# Altium PCB fan_toolips_f2_dip.PcbDoc
Units mil, origin at the board's own origin, x right, y up, seen from the top; angles counter-clockwise.
Board outline 1828.94 x 9262.02 mil, 2 copper layers (Top Layer, Bottom Layer); 58 components, 71 nets, 198 pads, 0 vias.
Unrouted connection lines stored in the file: 13.
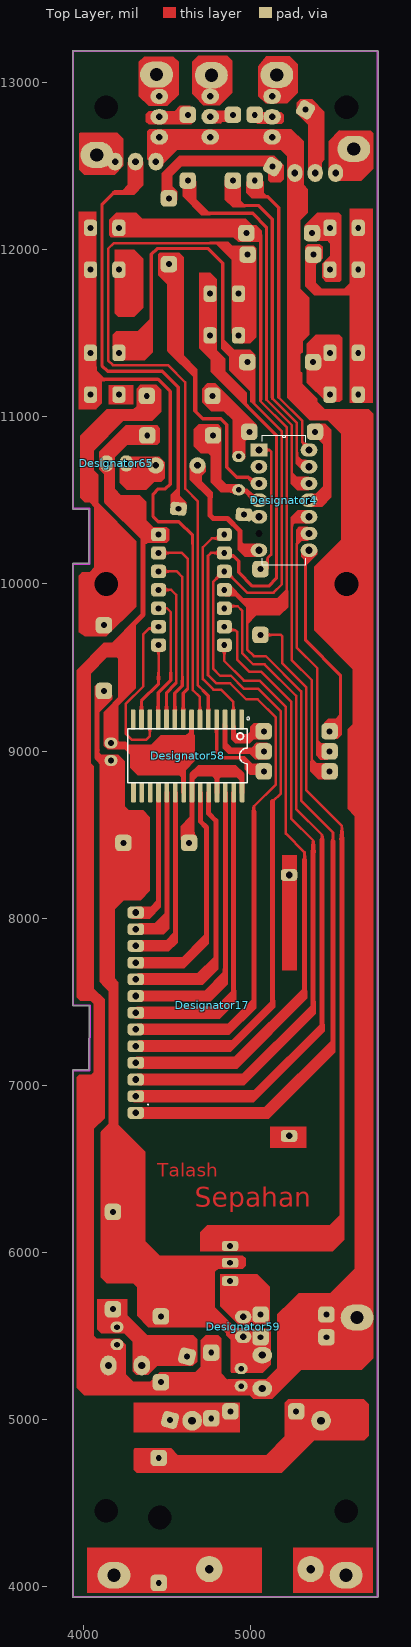
[diagram p0: Top Layer view]
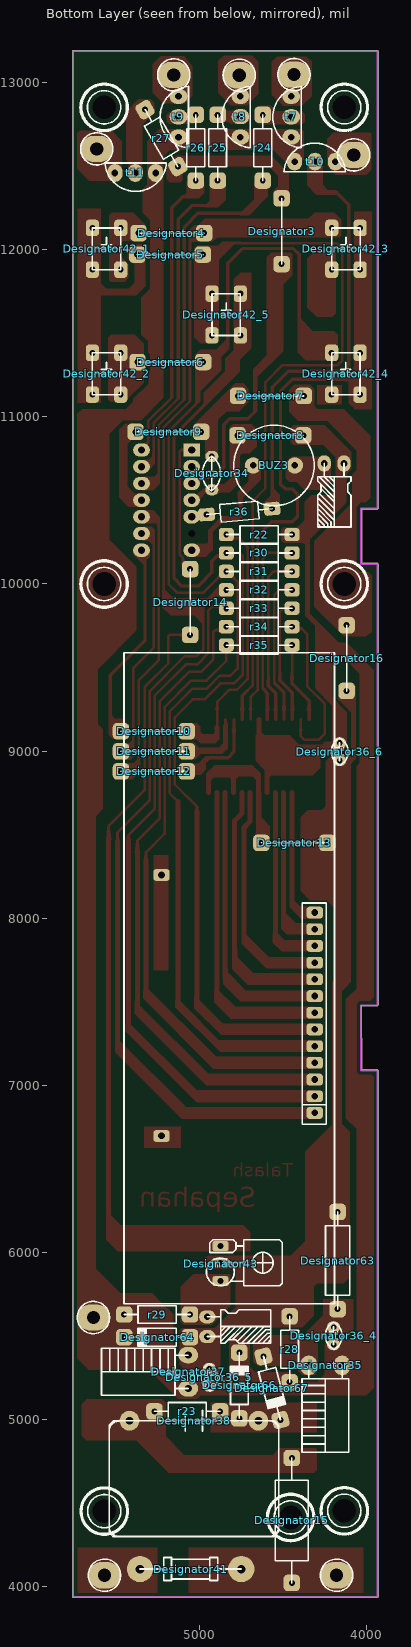
[diagram p1: Bottom Layer view, seen from below]

## Layer stack, top to bottom
Top Solder: solder mask 0.4, Solder Resist, Dk 3.5
Top Layer: signal copper 1.4
Dielectric 1: dielectric 12.6, FR-4, Dk 4.8
Bottom Layer: signal copper 1.4
Bottom Solder: solder mask 0.4, Solder Resist, Dk 3.5

## Board outline
3931.99,3937 3931.99,7086.61 cw(c3937,7086.61) 3937,7091.63 4030.5,7091.55 4030.98,7475.3 3937,7475.3 cw(c3937,7480.31) 3931.99,7480.31 3931.99,10118.11 cw(c3937,10118.11) 3937,10123.13 4030.46,10123.13 4030.46,10447.74 3937,10447.74 cw(c3937,10452.76) 3931.99,10452.76 3931.99,13188.98 cw(c3937,13188.98) 3937,13193.99 5755.42,13193.99 cw(c5755.91,13189) 5760.92,13189 5760.92,3937 cw(c5755.91,3937) 5755.91,3931.99 3937,3931.99 cw(c3937,3937)

## Design rules (kind name [scope] priority, off if disabled: settings)
Clearance [All] p1: gap=15 ignorepadtopadclearanceinfootprint=FALSE
ComponentClearance [All] p1: gap=0 collisioncheckmode=3 verticalgap=0 showdistances=FALSE
PolygonConnect [All] p1: connectstyle=Relief reliefconductorwidth=10 reliefentries=4 polygonreliefangle="90 Angle" airgapwidth=10
RoutingVias [All] p1: holewidth=28 width=50 viastyle="Through Hole" minholewidth=28 minwidth=50 maxholewidth=28 maxwidth=50
SolderMaskExpansion [All] p1: expansion=4 istentingtop=FALSE
Width [All] p1: maxlimit=100 minlimit=10 preferedwidth=10 minimp=50.000000 maximp=50.000000 favimp=50.000000
29 further rules are at their usual default settings.

## Components (designator, comment, footprint, x,y, rotation, side; value= is the part's Value field where it differs from the comment)
BUZ3 "Comment" BUZZER 4680,10710 r180 bottom
Designator3 "Comment" jamp 4509,11915 r90 bottom
Designator4 "Comment" dip14 5048,10802 r0 top
Designator4 "Comment" jamp 4972.3,12101 r0 bottom
Designator5 "Comment" jamp 4980.3,11972 r0 bottom
Designator6 "Comment" jamp 4978.3,11329 r0 bottom
Designator7 "Comment" jamp 4376.3,11126 r0 bottom
Designator8 "Comment" jamp 4379.3,10890 r0 bottom
Designator9 "Comment" jamp 4990.3,10911 r0 bottom
Designator10 "Comment" jamp 5077.3,9118 r0 bottom
Designator11 "Comment" jamp 5077.3,8998 r0 bottom
Designator12 "Comment" jamp 5077.3,8878 r0 bottom
Designator13 "Comment" jamp 4236.3,8450 r0 bottom
Designator14 "Comment" jamp 5057,10089 r270 bottom
Designator15 "Comment" "self _ra" 4448,4019 r90 bottom
Designator16 "Comment" jamp 4119.67,9359.78 r90 bottom
Designator17 "Comment" display_f2 4311,6833 r0 top locked
Designator34 "Comment" CAP-ADASI-200MIL 4926.95,10763.85 r270 bottom
Designator35 "Comment" CAP-EL-200MIL-RA 4147,5321 r0 bottom
Designator36_4 "Comment" CAP-ADASI-105MIL 4198,5551 r270 bottom
Designator36_5 "Comment" CAP-ADASI-105MIL 4941.8,5302.42 r270 bottom
Designator36_6 "Comment" CAP-ADASI-105MIL 4162.12,9047.99 r270 bottom
Designator37 "Comment" CAP-EL-200MIL-RA 5067.78,5183.14 r90 bottom
Designator38 "Comment" CAP-POLY 4648.35,4990 r0 bottom
Designator41 "Comment" FUZE 4750.7,4102 r0 bottom
Designator42_1 "Comment" SW-PUSH 5642.44,11882 r180 bottom locked
Designator42_2 "Comment" SW-PUSH 5642.44,11134 r180 bottom locked
Designator42_3 "Comment" SW-PUSH 4209,11881.89 r180 bottom locked
Designator42_4 "Comment" SW-PUSH 4209.37,11134 r180 bottom locked
Designator42_5 "Comment" SW-PUSH 4926,11488.19 r180 bottom locked
Designator43 "Comment" IR-RECIVER 4875,6036 r270 bottom
Designator58 "Comment" sop-28 4620.82,8970.5 r270 top
Designator59 "Comment" CAP-EL-105MIL-RA 4954,5494 r90 top
Designator63 "Comment" RES-0.5W 4174,6240.68 r270 bottom
Designator64 "Comment" DIOD 5451.7,5490 r180 bottom
Designator65 "Comment" CAP-EL-105MIL-RA 4253.72,10721.63 r180 top
Designator66 "Comment" DIOD 4762.34,5398.14 r270 bottom
Designator67 "Comment" DIOD 4516,4995 r75 bottom
r22 "Comment" RES-0.25W#1 4840.5,10296 r180 bottom
r23 "Comment" RES-0.25W#2 5271,5046 r180 bottom
r24 "Comment" RES-0.25W#2 4622.05,12809.28 r270 bottom
r25 "Comment" RES-0.25W#2 4892,12809.28 r270 bottom
r26 "Comment" RES-0.25W#2 5023.05,12809.28 r270 bottom
r27 "Comment" RES-0.25W#2 5130.15,12499.05 r60 bottom
r28 "Comment" RES-0.25W#2 4461,5221 r90 bottom
r29 "Comment" RES-0.25W#2 5451.7,5626 r180 bottom
r30 "Comment" RES-0.25W#1 4840.5,10185.63 r180 bottom
r31 "Comment" RES-0.25W#1 4840.5,10075.26 r180 bottom
r32 "Comment" RES-0.25W#1 4840.5,9964.89 r180 bottom
r33 "Comment" RES-0.25W#1 4840.5,9854.52 r180 bottom
r34 "Comment" RES-0.25W#1 4840.5,9744.15 r180 bottom
r35 "Comment" RES-0.25W#1 4840.5,9633.78 r180 bottom
r36 "Comment" RES-0.25W#3 4958,10416 r175 bottom
t7 "Comment" bt131 4451.66,12675.35 r90 bottom
t8 "Comment" bt131 4755.91,12675.95 r90 bottom
t9 "Comment" bt131 5126.66,12675.35 r90 bottom
t10 "Comment" bt131 4431.05,12529 r180 bottom
t11 "Comment" bt131 5262.95,12461 r0 bottom

## Footprints (in the part's own frame and the unit in brackets; to place one, negate y for a bottom-side part, rotate by r counter-clockwise, add the part's x,y. Pads: shape width x height; smd on the part's side, far side on the other; paste and mask are expansions set on the pad)
bt131 [mm]
  oval 2.3x2.7 hole 1: A1(0,0) A2(6.2,0) G(3.1,0)
  silkscreen extent -1.62,-1.52 7.72,2.8
BUZZER [mm]
  round 2.5 hole 1: 1(0,0) 2(6.35,0)
  silkscreen extent -2.95,-6.12 9.3,6.12
CAP-ADASI-105MIL [mm]
  oval 1.7x2 hole 0.85: 1(0,0) 2(2.667,0)
  silkscreen extent -0.76,-1.25 3.41,1.3
CAP-ADASI-200MIL [mm]
  oval 1.7x2 hole 0.85: 1(0,0) 2(5.08,0)
  silkscreen extent -0.05,-1.45 5.25,1.35
CAP-EL-105MIL-RA [mm]
  oval 2x2.5 hole 1: +(3,0) -(0,0)
CAP-EL-200MIL-RA [mm]
  oval 2.5x3 hole 1.1: +(0,0) -(5.08,0)
  silkscreen extent -1.02,0 6.1,13.21
CAP-POLY [mm]
  round 3 hole 1.2: 1(0,0) 2(19.6,0)
  silkscreen extent -3.1,-1.6 22.7,17.6
DIOD [mm]
  rrect50% 2.5x2.5 hole 0.9: a(10,0) c(0,0)
  silkscreen extent 0,-1.35 10,1.35
dip14 [mil]
  rect 100x80 hole 44: 1(0,0)
  oval 100x80 hole 44: 2(0,-100) 3(0,-200) 4(0,-300) 5(0,-400) 7(0,-600) 8(300,-600) 9(300,-500) 10(300,-400) 11(300,-300) 12(300,-200) 13(300,-100) 14(300,0)
  round 0 hole 44: 6(0,-500)
  silkscreen extent 20,-688 280,88
display_f2 [mm]
  rrect50% 2.5x1.778 hole 1: 1(0,0) 2(0,2.54) 3(0,5.08) 4(0,7.62) 5(0,10.16) 6(0,12.7) 7(0,15.24) 8(0,17.78) 9(0,20.32) 10(0,22.86) 11(0,25.4) 12(0,27.94) 13(0,30.48) 14(23.3,-3.5) 15(23.3,36.18)
  silkscreen extent 1.85,1.27 1.88,1.3
FUZE [mm]
  round 4 hole 1.3: 1(0,0) 2(15.4,0)
  silkscreen extent 0,-1.75 15.4,1.75
IR-RECIVER [mm]
  rrect50% 1.5x2.5 hole 0.9: 1(0,0) 2(2.54,0) 3(5.334,0)
  silkscreen extent -0.97,-2.13 6.05,9.4
jamp [mm]
  rrect50% 2.5x2.5 hole 0.9: 1(0,0) 2(10,0)
  silkscreen extent 0,0 10,0
RES-0.5W [mm]
  rrect50% 2.5x2.5 hole 0.9: 1(0,0) 2(14.8,0)
  silkscreen extent 0,-1.85 14.8,1.85
RES-0.25W#1 [mil]
  rrect50% 90x80 hole 35.43: 1(0,0) 2(393.7,0)
  silkscreen extent 0,-53 394,53
RES-0.25W#2 [mil]
  rrect50% 98.43x98.43 hole 35.43: 1(0,0) 2(393.7,0)
  silkscreen extent 0,-53 394,53
RES-0.25W#3 [mil]
  rrect50% 98.43x80 hole 35.43: 1(0,0) 2(393.7,0)
  silkscreen extent 0,-53 394,53
"self _ra" [mm]
  rrect50% 2.5x2.5 hole 0.9: 1(0,0) 2(19,0)
  silkscreen extent 0,-2.5 19,2.5
sop-28 [mil]
  rrect50% 120x28 smd: 1(-218.5,323.82) 2(-218.5,273.82) 3(-218.5,223.82) 4(-218.5,173.82) 5(-218.5,123.82) 6(-218.5,73.82) 7(-218.5,23.82) 8(-218.5,-26.18) 9(-218.5,-76.18) 10(-218.5,-126.18) 11(-218.5,-176.18) 12(-218.5,-226.18) 13(-218.5,-276.18) 14(-218.5,-326.18) 15(218.5,-323.82) 16(218.5,-273.82) 17(218.5,-223.82) 18(218.5,-173.82) 19(218.5,-123.82) 20(218.5,-73.82) 21(218.5,-23.82) 22(218.5,26.18) 23(218.5,76.18) 24(218.5,126.18) 25(218.5,176.18) 26(218.5,226.18) 27(218.5,276.18) 28(218.5,326.18)
  silkscreen extent -233,-358 161,371
SW-PUSH [mm]
  rrect50% 2x2.5 hole 0.9: 1(0,0) 1(0,6.35) 2(4.318,0) 2(4.318,6.35)
  silkscreen extent 0,0 4.32,6.35

## Free pads (board coordinates)
  round 60 hole 141.73: 8(4133.86,4451) 8(4134,10000) 8(4134,12854.33) 8(4455,4411) 8(5571,4448.82) 8(5572,10000) 8(5572,12854)
  oval 196.85x157.48 hole 78.74: 9(4077,12569) 9(4180,4065) 9(4435,13050) 9(4763,13046) 9(5155,13048) 9(5570,4065) 9(5616,12605) 9(5636,5608)

## Nets (pads, with @x,y where several pads share a name; then routed paths per layer and width w, separated by ;. In a path a pad name is that pad's centre, name@x,y a point inside that pad or via, vN(x,y) a via of type N, cw(c..) or ccw(c..) an arc to the next point about the centre after c; other vN are vias at no path point)
a: 
a1: Designator41.2 pad.9@5570,4065 | length 228.3
  Top Layer w60: Designator41.2 5375.5,4083.5 5551.5,4083.5 pad.9@5570,4065
a2: Designator15.1 Designator41.1 pad.9@4180,4065 | length 651.8
  Top Layer w60: pad.9@4180,4065 4198.5,4083.5 4445,4083.5 ; Designator15.1 4445,4022 4445,4083.5 ; Designator41.1 4732.2,4083.5 4445,4083.5
a3: Designator15.2 Designator38.2 r23.1 | length 1159
  Top Layer w60: Designator15.2 4483.03,4732 5127,4732 5256,4861 5256,4973 5270.94,4987.94 5417.94,4987.94 Designator38.2
a4: Designator38.1 Designator66.a Designator67.c r23.2 | length 382.4
  Top Layer w60: Designator67.c 4826.3,4995 r23.2
a5: 
a6: 
a7: 
a8: 
a9: 
b: Designator43.3 Designator59.+ r29.2 | length 318.6
  Top Layer w30: Designator43.3 4875,5736 4963.79,5647.21 5036.79,5647.21 r29.2
b1: BUZ3.1 Designator4.7 | length 780.6
  Top Layer w30: BUZ3.1 4680,10603 4756,10527 4756,10409.57 4773.57,10392 4860.21,10392 4936,10316.21 4936,10209.57 4953.57,10192 4995.43,10192 4995.86,10192.43 5038.43,10192.43 Designator4.7
b2: BUZ3.2 Designator65.- | length 181.1
  Top Layer w30: Designator65.- 4259.54,10715.81 4424.19,10715.81 BUZ3.2
b3: 
b4: 
b5: 
b6: 
b7: 
c: Designator4.8 Designator10.1 Designator10.2 Designator58.2 r22.1 | length 2816.1
  Top Layer w15: r22.1 4817,10272.5 4765.5,10272.5 4713,10220 4713,9430 4775,9368 4821,9368 4894.64,9294.36 4894.64,9079.36 4906,9068 4989,9068 5010.72,9089.72 5049.02,9089.72 Designator10.1
  Top Layer w20: Designator4.8 5327,10181 5327,9662 5536,9453 5536,9183 Designator10.2
c1: Designator4.9 Designator11.1 Designator11.2 Designator58.3 | length 1859
  Top Layer w15: Designator4.9 5338,10302 5275.5,10239.5 5275.5,9617.5 5397,9496 5397,9013 5408.07,9001.93 5467.07,9001.93 Designator11.2
  Top Layer w20: Designator58.3 4844.64,9032.36 4879,8998 Designator11.1
c2: Designator4.10 Designator12.1 Designator12.2 Designator58.4 | length 2285.5
  Top Layer w15: Designator4.10 5274,10402 5245.5,10373.5 5245.5,10163.69 cw(c5230.5,10163.63) 5245.5,10163.63 5245.5,9542.5 5364,9424 5364,8926 5408.07,8881.93 5467.07,8881.93 Designator12.2
  Top Layer w20: Designator58.4 4794.64,8994.36 4829.75,8959.25 4958.75,8959.25 4979,8939 4979,8901 5002,8878 Designator12.1
c3: 
c4: 
c5: 
d1: Designator17.13 Designator58.18 | length 821.6
  Top Layer w30: Designator17.13 4390,8033 4447,8090 Designator58.18
d2: Designator17.12 Designator58.19 | length 979.2
  Top Layer w30: Designator17.12 4453,7933 4497,7977 Designator58.19
d3: Designator17.11 Designator58.20 | length 1123.4
  Top Layer w30: Designator17.11 4493,7833 4547,7887 Designator58.20
d4: Designator17.10 Designator58.23 | length 1363
  Top Layer w30: Designator17.10 4573,7733 4734,7894 4734,8542 4697,8579 Designator58.23
d5: Designator17.9 Designator58.24 | length 1547.9
  Top Layer w30: Designator17.9 4674,7633 4790,7749 4790,8583 4747,8626 Designator58.24
d6: Designator17.8 Designator58.26 | length 1695.8
  Top Layer w30: Designator17.8 4746,7533 4847,7634 Designator58.26
d7: Designator17.7 Designator58.27 | length 1838.2
  Top Layer w30: Designator17.7 4783,7433 4897,7547 Designator58.27
d8: Designator17.6 Designator42_5.2 r30.1 | length 6199.7
  Top Layer w15: r30.1 4759.79,10185.63 4743,10168.85 4743,9455 4793,9405 4876.01,9405 4972.01,9309 5041,9309 5149.01,9200.99 5149.01,8800.01 5017,8668 5017,8633.5
  Top Layer w20: Designator42_5.2@4756,11738.19 4756,11488.19 4756,11400 4797,11359 4797,11298 4811.5,11283.5 4811.5,11233.5 5153,10892 5153,10125.37 5153,10035 5105.77,9987.77 5009.23,9987.77 4927,10070 4927,10137 4897.29,10166.71 4859.42,10166.71 r30.1
  Top Layer w30: Designator17.6 4881.5,7333 5017,7468.5 5017,8633.5
d9: Designator6.1 Designator6.2 Designator17.5 Designator42_2.2 Designator42_4.1@4209.37,11384 r31.1 | length 7580
  Top Layer w15: Designator6.1 5002.71,11304.59 5002.71,11095.29 5185.5,10912.5 5185.5,9998.5 5136,9949 4977,9949 4850.74,10075.26 4835.5,10075.26 4773,10012.76 4773,9493 4815.5,9450.5 4880.01,9450.5 4956.51,9374 5042,9374 5179.01,9236.99 5179.01,8746.01 5130,8697
  Top Layer w20: Designator42_4.1@4209.37,11384 4368,11384 4404,11420 4404,11974.5 4438,12008.5 4743.5,12008.5 4832,11920 4832,11412 4889,11355 4952.3,11355 Designator6.1
  Top Layer w30: Designator17.5 4867,7233 5130,7496 5130,8697
d10: Designator17.4 r35.1 | length 3517
  Top Layer w15: r35.1 4840.5,9539.5 4958.01,9422 5051,9422 5209.01,9263.99 5209.01,8505.99 5322,8393 5322,8348
  Top Layer w30: Designator17.4 4897.5,7133 5322,7557.5 5322,8348
d11: Designator17.3 r34.1 | length 3805.3
  Top Layer w15: r34.1 4860.65,9724 4906,9724 4917,9713 4917,9548 4989,9476 5060,9476 5240,9296 5240,8596 5373,8463 5373,8388
  Top Layer w30: Designator17.3 4935,7033 5373,7471 5373,8388
d12: Designator17.2 r33.1 | length 4136.7
  Top Layer w15: r33.1 4852.98,9867 4921,9867 4947,9841 4947,9586 5014,9519 5082,9519 5270,9331 5270,8654 5427,8497 5427,8468
  Top Layer w30: Designator17.2 5003,6933 5427,7357 5427,8468
d13: Designator4.1@4972.3,12101 Designator17.1 Designator42_3.1@4209,12131.89 r32.1 | length 7765.6
  Top Layer w15: r32.1 4844.61,9960.78 4899.22,9960.78 4955,9905 4977,9905 ; 5058,11106 5058,11094 5215.5,10936.5 5215.5,9956.5 5164,9905 4977,9905 ; 5491,8458 5491,8513 5300,8704 5300,9357 5089,9568 5018,9568 4977,9609 4977,9905
  Top Layer w20: Designator42_3.1@4209,12131.89 4933.5,12131.89 4964.39,12101 5046.28,12101 5058,12089.28 5058,11106
  Top Layer w30: Designator17.1 5104,6833 5491,7220 5491,8458
d14: 
d15: 
dd8: Designator58.8 r30.2 | length 1162.1
  Top Layer w15: r30.2 4586.37,10185.63 4623,10149 4623,9373
  Top Layer w20: Designator58.8 4594.64,9347.14 4620.5,9373
dd9: Designator58.9 r31.2 | length 1027.9
  Top Layer w15: r31.2 4556.74,10075.26 4589,10043 4589,9401
  Top Layer w20: Designator58.9 4544.64,9346.63 4589,9391 4589,9401
dd10: Designator58.13 r35.2 | length 487.1
  Top Layer w15: 4446.8,9425.16 r35.2
  Top Layer w20: Designator58.13 4344.64,9299.64 4446.8,9401.8 4446.8,9425.16
dd11: Designator58.12 r34.2 | length 1016.5
  Top Layer w15: Designator58.12 4394.64,9089.64 4372,9067 4289,9067 4250,9106 4250,9282 4356,9388 4356,9700 4390,9734 4436.65,9734 r34.2
dd12: Designator58.11 r33.2 | length 757.1
  Top Layer w15: r33.2 4447.28,9855 4497,9855 4520,9832 4520,9423.92
  Top Layer w20: Designator58.11 4444.64,9348.56 4520,9423.92
dd13: Designator58.10 r32.2 | length 888.7
  Top Layer w15: r32.2 4523.11,9964.89 4553,9935 4553,9407.43 4544.79,9399.21
  Top Layer w20: Designator58.10 4494.64,9349.06 4544.79,9399.21
dd14: 
g1: r36.2 t10.G | length 2610.1
  Top Layer w20: t10.G 4309,12375 4276,12342 4179,12342 4108,12271 4108,11308 4142,11274 4470,11274 4564.8,11179.2 r36.2@4564.8,10440.31
g1_i: Designator4.5 r36.1 | length 95.8
  Top Layer w20: r36.1 4965.4,10408.6 5041.4,10408.6 Designator4.5
g2: r24.1 t7.G | length 175.3
  Top Layer w30: t7.G 4457.6,12803.34 4616.11,12803.34 r24.1
g2_i: Designator4.12 r24.2 | length 2315.2
  Top Layer w15: 5093,11108.5 5093,11103 5245.5,10950.5 5245.5,10645.5 5287,10604 5346,10604 Designator4.12
  Top Layer w20: r24.2 4622.05,12323.95 4727,12219 5011,12219 5093,12137 5093,11108.5
g3: r25.1 t8.G | length 140.8
  Top Layer w30: t8.G 4761.54,12803.64 4886.36,12803.64 r25.1
g3_i: Designator4.13 r25.2 | length 1965.1
  Top Layer w15: 5128,11123 5128,11110.43 5275.5,10962.93 5275.5,10764.5 5338,10702 Designator4.13
  Top Layer w20: r25.2 4892,12324 4950,12266 5047,12266 5128,12185 5128,11123
g4: r26.1 t9.G | length 108.5
  Top Layer w15: r26.1 5034.93,12797.4 t9.G
g4_i: Designator4.14 r26.2 | length 1778.1
  Top Layer w15: 5166.68,11117.7 5308,10976.39 5308,10849.59 5348,10809.59 Designator4.14
  Top Layer w20: r26.2 5023.05,12345.95 5050,12319 5101,12319 5166.68,12253.32 5166.68,11117.7
g5: r27.2 t11.G | length 406.3
  Top Layer w30: r27.2 5389,12778 5389,12465 t11.G
g5_i: Designator3.1 Designator3.2 Designator4.3 r27.1 | length 2488.3
  Top Layer w20: Designator3.1 4509,11398 4663,11244 4663,11038 4711,10990 4819,10990 4856,10953 4856,10698 4915,10639 4984.76,10639 5021.76,10602 Designator4.3 ; Designator3.2 4509,12470 4584,12545 5056.26,12545 5102.22,12499.05 r27.1
gnd: Designator4.11 Designator7.1 Designator7.2 Designator9.1 Designator9.2 Designator13.1 Designator13.2 Designator16.1 Designator16.2 Designator34.1 Designator36_5.1 Designator36_6.2 Designator37.- Designator43.2 Designator58.22 Designator58.25 Designator58.28 Designator59.- Designator63.1 Designator64.a pad.8@4134,10000 r28.2 | length 7737.1
  Top Layer w30: Designator16.1 4096.9,9337 4096.9,9259.33 4079,9241.43 4079,8961.87 4130,8910.87 ; 4280,5930 4286,5936 Designator43.2 ; Designator13.2 4646,8466 4646,8751 Designator58.22 4647,8859 4688,8900 4797,8900 ; Designator7.2 4924.7,10971.3 4924.7,10766.09 Designator34.1 ; Designator58.25 4797,8900 ; 4929.82,10904 4983.3,10904 Designator9.1 ; Designator58.28 4947,8859 4906,8900 4797,8900 ; Designator4.11 5352,10506 5429,10506 5465,10542 5465,10876 5431,10910 5385,10910 Designator9.2
  Top Layer w60: 4130,8910.87 4130,8560 ; Designator13.1@4239.3,8450.7 4130,8560 ; Designator36_5.1 4941.8,5485.34 4950.46,5494 Designator59.- ; Designator37.- 5062.89,5388.03 5062.89,5485.11 Designator64.a 5056,5492 4956,5492 Designator59.- ; 4130,8560 4130,7622 4178,7574 4178,6758 4130,6710 4130,6080 4280,5930 4460,5750 4460,5601.7 4805.3,5601.7 4909.41,5497.59 4950.41,5497.59 Designator59.-
gnd_s: Designator35.- Designator36_4.1 Designator63.2 Designator67.a
ir: Designator4.1@5048,10802 Designator14.1 Designator14.2 Designator43.1 | length 5373.5
  Top Layer w15: Designator4.1@5048,10802 5111.71,10802 5120.5,10793.21 5120.5,10176.11 5100.11,10155.72 5100.11,10092.81 Designator14.1@5083,10075.7 ; Designator14.2 5179.21,9695.3 5188,9686.51 5188,9525 5330,9383 5330,8766 5545,8551 5545,8468
  Top Layer w30: Designator43.1 5479,6036 5545,6102 5545,8468
o1: pad.9@4077,12569 t10.A2
o2: pad.9@4435,13050 t7.A2
o3: pad.9@4763,13046 t8.A2
o4: pad.9@5155,13048 t9.A2
o5: pad.9@5616,12605 t11.A2
o6: 
ph1: 
ph2: 
sw1: Designator5.1 Designator5.2 Designator42_1.1 Designator42_2.1 Designator42_5.1 Designator58.5 | length 6132.7
  Top Layer w15: 4715,9361 4683,9393 4683,10495 4607,10571 4607,11207 4503,11311 4173.5,11311 4145.5,11339 4145.5,12007.5 4179,12041 4826,12041 4871,11996 4956.3,11996 Designator5.1 4926,11917.7 4926,11738.19 Designator42_5.1@4926,11488.19 ; Designator5.2 5374,11769 5398,11745 5618,11745 5642.44,11769.44 ; Designator42_2.1@5642.44,11134 5642.44,11384 5642.44,11769.44 ; Designator42_1.1@5642.44,12132 5642.44,11882 5642.44,11769.44
  Top Layer w20: 4715,9361 4744.64,9331.36 Designator58.5
sw2: Designator4.2@5366,12101 Designator42_1.2 Designator42_3.2 Designator42_4.2 Designator58.6 | length 3095.7
  Top Layer w15: 4653,10240 4653,9364 4694.64,9322.36 Designator58.6
  Top Layer w20: 4067,11225 4444,11225 4516,11153 4516,10598 4487,10569 4446,10569 4414,10537 4414,10404 4445,10373 4569,10373 4650.5,10291.5 4650.5,10240 ; Designator4.2@5366,12101 5381.5,12116.5 5456.94,12116.5 5472.44,12132 5472.44,12051.74 5508,12016.18 5508,11951 5495.83,11938.83 5495.83,11905.39 Designator42_1.2@5472.44,11882
sw3: 
vcc: Designator4.4 Designator8.1 Designator8.2 Designator34.2 Designator35.+ Designator36_4.2 Designator36_5.2 Designator36_6.1 Designator37.+ Designator58.7 Designator58.21 Designator64.c Designator65.+ Designator66.c pad.8@5572,10000 pad.9@5636,5608 r22.2 r28.1 r29.1 t7.A1 t8.A1 t9.A1 t10.A1 t11.A1 | length 18840.3
  Top Layer w30: Designator36_4.2@4203,5433 4195.93,5425.93 4164.57,5425.93 4147,5408.36 Designator35.+@4147,5330.84 ; Designator8.1 4239,10890 4195,10846 4195,10791.4 4135.61,10732.01 Designator65.+ 4135.61,10494.39 4355,10275 ; t10.A1 4441.35,12539.31 4441.35,12665.05 t7.A1 4755.91,12675.35 t9.A1 5211.65,12675.35 5262.95,12624.05 t11.A1 5262.95,11197.05 5574,10886 5574,10279 5393,10098 5393,9816 5658,9551 5658,5630 5636,5608 5627,5617 5460.7,5617 r29.1 5435,5609.3 5435,5490 5435,5379 5414,5358 5252.48,5358 5077.62,5183.14 Designator37.+ 5060.56,5190.36 4948.86,5190.36 Designator36_5.2 4936.51,5202.71 4465.29,5202.71 4460,5208 4177.67,5208 4160.09,5225.57 4160.09,5307.91 Designator35.+ Designator35.+@4147,5330.84 ; r22.2 4443.37,10292.57 4372.57,10292.57 4355,10275 ; Designator58.21 4597,9013 ; Designator58.7 4644.64,9060.64 4597,9013 ; Designator8.2 4773,10615 4824.15,10563.85 Designator34.2 4934.01,10556.78 4972.57,10556.78 5027.36,10502 Designator4.4 ; 4142,9604 4355,9817 4355,10275 ; 4142,9604 4002,9464 4002,7554 4028,7528 4037.81,7528 4104,7461.81 4104,6995 4010,6901 4010,5422.57 4027.57,5405 4072.84,5405 Designator35.+@4147,5330.84 ; 4142,9604 4205,9604 4231,9578 4231,9326 4132,9227 4132,9082.2 4162.12,9052.08 Designator36_6.1 4169.19,9040.93 4245.09,9040.93 4278.01,9008 4592,9008 4597,9013
pads on no net: Designator4.2@5048,10702 Designator4.6 Designator17.14 Designator17.15 Designator42_3.1@4209,11881.89 Designator42_4.1@4209.37,11134 Designator58.1 Designator58.14 Designator58.15 Designator58.16 Designator58.17

## Keep-outs
Keep-Out Layer:
  lines w10: 5755.88,13188.98 cw(c5755.88,13188.95) 5755.91,13188.95 5755.91,3937 3937,3937 3937,7086.61 4035.51,7086.54 4036,7477 3936,7477 3936,10118.11 4035.47,10118.11 4035.47,10452.76 3937,10452.76 3937,13188.98 5755.88,13188.98 ; 5755.88,13188.98 ccw(c5755.88,13189) 5755.91,13189 ; 5755.88,13188.98 ccw(c5755.88,13189) 5755.91,13189

## Other copper
Top Layer:
  rectangle: 5113,6623 5334,6753
  rectangle: 5187,7687 5275,8377
  rectangle: 4148,11076 4298,11192
  rectangle net sw2: 3969,11045 4076,12231
  rectangle net sw1: 5591,11083 5730,12249
  rectangle net a4: 4296,4920 4936,5100
  rectangle net a1: 5253,3960 5732,4232
  rectangle net a2: 4018,3960 5067,4230
  region net vcc: 4823,10876 4823,10936 4803,10956 4688,10956 4659,10927 4659,10824 4701,10782 4743.5,10782 4773,10752.5 4773,10615 4831.22,10556.78 4934.01,10556.78 4934.01,10584.01 4937,10587 4928,10596 4853,10596 4821,10628 4821,10915 4806,10930
  region net b1: 5051,10243 5050,10242 4956.89,10242 4944.79,10254.11 4944.79,10181.21 4963,10163 5051,10163
  region net d13: 4875.46,9995.54 4955,9916 5159,9916 5214,9971 5214,9970 5223,9961 5223,9862 5173,9812 5033,9812 4977,9756 4977,9856 4906,9927 4846,9927 4846,9942 4835,9953
  region net c: 5397,10200 5397,10177 5331,10111 5331,10132 5300,10163 5300,10198 5302,10198 5310,10206
  region net c1: 5341,10342 5340,10343 5287,10343 5270,10326 5270,10201 5277,10208 5277,10233 5304,10260 5343,10260 5343,10261 5370,10288
  region net c2: 5347,10441 5279,10441 5238,10400 5238,10352 5249,10341 5253,10345 5253,10354 5262,10363 5353,10363 5363,10373
  region net g2_i: 5346,10642 5345,10643 5273,10643 5249,10667 5249,10668 5238,10657 5238,10601 5277,10562 5345,10562
  region net gnd: 5389,10959 5446,10959 5481,10924 5481,10518 5427,10464 5355,10464 5355,10483 5331,10507 5355,10531 5355,10541 5388,10541 5432,10585 5432,10838 5394,10876
  region net g3_i: 5268,10794.77 5268,10720 5303,10685 5337,10685 5337,10726 5343,10732 5330,10745 5303,10745 5283,10765 5283,10789
  region net b1: 4631,10708 4635,10704 4635,10625 4755,10505 4755,10501 4771,10517 4771,10549 4705,10615 4705,10649 4729,10673 4729,10708
  region net gnd: 4743,11192 4748,11197 4792,11197 5036,10953 5036,10879 5023,10866 4979,10866 4967,10854 4967,10754 4953,10740 4945,10748 4899,10748 4899,10753 4890,10762 4891,10763 4891,10982 4838,11035 4762,11035 4708,11089 4708,11170 4740,11202 4787,11202 4792,11197
  region net c2: 5469,8926 5395,8926 5370,8951 5370,8953 5356,8939 5356,8878 5403,8831 5475,8831
  region net c1: 5469,9046 5422,9046 5404,9064 5404,9057 5390,9043 5390,8974 5415,8949 5461,8949
  region net gnd: 4580,8469 4580,8550 4635,8605 4635,8448 4644,8439
  region net c: 5467,9098 5488,9077 5488,9074 5521,9074 5545,9098 5545,9241 5535,9251 5530,9246 5530,9216 5508,9194 5463,9194 5438,9169 5438,9131
  region net gnd: 4654,8788 4661,8795 4661,8829 4681,8849 4767,8849 4790,8826 4803,8826 4819,8842 4916,8842 4938,8820 4948,8830 4948,8847 4941,8847 4889,8899 4882,8892 4680,8892 4655.39,8867.39
  region net c2: 5097,8925 5006,8925 5006,8926 4963,8969 4935,8969 4935,8962 4931,8958 4963,8926 4963,8890 4994,8859 5038,8859 5056,8841
  region net c1: 4858,9153 4858,9047 4885,9020 5005,9020 5033,9048 5097,9048 5097,9047 5115,9029 5115,8969 5097,8951 5027,8951 4993,8985 4865,8985 4832,9018 4832,9164 4838,9170
  region net c: 5070,9166 5017,9166 4996,9145 4996,9115 4981,9100 4919,9100 4907,9112 4908,9113 4908,9151 4893,9151 4891,9153 4882,9144 4882,9070 4907,9045 4993,9045 5018,9070 5086,9070
  region net vcc: 4255.58,9046.42 4265,9037 4404,9037 4460,9093 4611,9093 4631,9113 4634,9110 4653,9110 4653,9105 4665,9093 4665,8941 4610,8886 4610,8829 4596,8829 4570,8855 4323,8855 4278,8900 4278,8977 4245,9010 4162.18,9010 4214.97,9049.36
  region net gnd: 4094,9009 4092,9007 4092,8991 4107,8976 4108,8977 4207,8977 4244,8940 4244,8668 4268,8644 4354,8644 4395,8603 4395,8162 4340,8107 4238,8107 4184,8053 4184,7638 4207,7615 4207,7566 4149,7566 4096,7619 4096,8956 4083,8969
  region net g1: 4518,10465 4520,10467 4520,10534 4559,10573 4575,10557 4575,10529 4614,10490 4614,10438
  region net vcc: 4184,10625 4184,10569 4221,10532 4333,10532 4372,10493 4372,10383 4422,10333 4406,10317 4329,10317 4160,10486
  region net b2: 4251.51,10761 4450,10761 4483,10728 4483,10632 4462,10611 4420,10611 4374,10565 4256,10565 4215,10606 4215,10714 4215.86,10727.55
  region net vcc: 4093,10791 4252,10950 4438,10950 4455,10933 4455,10849 4440,10834 4259,10834 4184,10759 4184,10491 4334,10341 4497,10341 4510,10328 4510,10262 4495,10247 4384,10247 4377,10240 4351,10240 4351,10260 4121,10490 4121,10658 4093,10686 4093,10725 4093,10686 4093,10725
  region net gnd: 4006,9686 4135,9686 4314,9865 4314,10257 4085,10486 4085,10655 4059,10681 4059,10799 4237,10977 4409,10977 4462,11030 4462,11164 4434,11192 4338,11192 4315,11169 4315,11064 4296,11045 4136,11045 3979,10888 3979,10515 4005,10489 4034,10489 4062,10461 4062,10099 4034,10071 3986,10071 3986,10068 3968,10050 3968,9712.48
  region net gnd: 4065,9241 4065,9387 4073.5,9395.5 4096,9373 4113,9373 4151,9335 4169,9335 4169,9310 4085,9226 4085,9213.33
  region net d9: 4209.37,11384 4185.37,11408 4174,11408 4174,11493 4195,11514 4323,11514 4408,11599 4408,11576 4413,11571 4413,11389 4364,11340 4217,11340
  region net d9: 4834,11509 4834,11467 4899,11402 4997,11402 5025,11374 5025,11071 5023,11069 5002.71,11089.29 5002.71,11147.29 4870,11280 4870,11374 4832,11412
  region net d8: 4690,11865 4755,11865 4795,11825 4795,11401 4847,11349 4847,11274 4873,11248 4976,11145 4976,11055 4760,11271 4760,11342 4690,11412
  region net g5_i: 4454,11983 4571,11983 4598,11956 4598,11369 4680,11287 4680,11016 4663,11033 4663,11236 4509,11390 4509,11786 4445,11850 4445,11974
  region: 4184,12001 4184,11620 4205,11599 4300,11599 4356,11655 4356,11946 4301,12001
  region net sw2: 4030.46,12090 4077,11277 4132,11222 4133,11222 4126,11215 4106,11215 4106,11083 4069.48,11046.48
  region net g1: 4273,12534 4272,12534 4263,12525 4263,12389 4233,12359 4182,12359 4171,12348 4171,12332 4301,12332 4356,12387 4356,12527
  region net sw1: 4888,11499 4886,11501 4886,11940 4792,12034 4758,12034 4758,12043 4753,12048 4865,12048 4889,12024 5017,12024 5032,12009 5032,11476 4996,11440 4929,11440
  region net d13: 5056,12048 5066,12058 5066,12114 5032,12148 5008,12148 4970,12186 4350,12186 4312,12224 4193,12224 4151,12182 4151,12087 4161,12077 4894,12077 4923,12048
  region net g4_i: 4973,12408 4973,12343 5006,12310 5092,12310 5101,12319 5076,12344 5076,12411
  region net g3_i: 4844,12418 4844,12302 4890,12256 4967,12256 4967,12267 4940,12294 4940,12397
  region net g2_i: 4571,12401 4591,12381 4591,12321 4703,12209 4757,12209 4762,12214 4672,12304 4672,12411
  region net vcc: 5235,5703 5285,5753 5475,5753 5623,5901 5623,8610 5580,8653 5580,9131 5610,9161 5610,9491 5379,9722 5379,10097 5541,10259 5541,10905 5465,10981 5351,10981 5218,11114 5218,12434 5218,12561 5179,12600 4559,12600 4474,12515 4474,12508 4414,12508 4378,12544 4378,12711 4391,12724 5241,12724 5315,12650 5315,12389 5341,12363 5341,12222 5296,12177 5296,11767 5350,11713 5350,11493 5309,11452 5309,11388 5296,11375 5296,11275 5306,11265 5306,11200 5398,11108 5398,11090 5441,11047 5704,11047 5732,11019 5732,5364 5717,5349
  region net ir: 4698,6005 5489,6005 5559,6075 5559,6300 5552,6307 5535,6290 5535,6222 5473,6160 4738,6160 4698,6120
  region net d11: 4921,6999 4961,6999 5388,7426 5388,7502 5363,7477
  region net d13: 4310,6867 5081,6867 5486,7272 5486,7254 5506,7234 5506,7197 5106,6797 4308,6797
  region net d12: 4309,6968 5017,6968 5426,7377 5426,7380 5441,7365 5441,7321 5018,6898 4297,6898
  region net d11: 4320,7068 4962,7068 4957,7063 4957,7035 4921,6999 4328,6999
  region net d10: 4314,7168 4901,7168 5323,7590 5323,7578 5337,7564 5337,7519 4917,7099 4324,7099
  region net d9: 4326,7269 4891,7269 5131,7509 5131,7516 5137,7516 5145,7508 5145,7467 4878,7200 4309,7200
  region net d8: 4319,7368 4320,7367 4862,7367 5008,7513 5008,7561 5031,7538 5031,7461 4870,7300 4333,7300
  region net d7: 4315,7468 4788,7468 4901,7581 4901,7579 4911,7569 4911,7495 4814,7398 4305,7398
  region net d6: 4312,7566 4724,7566 4832,7674 4832,7696 4860,7668 4860,7604 4758,7502 4334,7502
  region net d5: 4320,7600 4712,7600 4805,7693 4805,7812 4787,7830 4776,7819 4776,7764 4680,7668 4321,7668
  region net d4: 4315,7698 4601,7698 4749,7846 4749,7900 4614,7765 4320,7765
  region net d3: 4316,7868 4492,7868 4536,7912 4536,7930 4562,7904 4562,7853 4509,7800 4328,7800
  region net d2: 4328,7968 4425,7968 4485,8028 4485,8056 4512,8029 4512,7936 4479,7903 4322,7903
  region net d1: 4287,7996 4393,7996 4461,8064 4461,8122 4444,8139 4434,8129 4434,8103 4399,8068 4313,8068
  region net sw1: 5325,11990 5325,12019 5341,12035 5413,12035 5430,12018 5430,11951 5389,11910 5389,11803 5423,11769 5560,11769 5599,11808 5607,11800 5643,11800 5643,11756 5617,11730 5379,11730 5326,11783 5326,11943
  region net sw2: 5348,12055 5469.18,12055 5475,12049.18 5475,11966 5426,11917 5426,11834 5449,11811 5533,11811 5542,11820 5542,12207 5525,12224 5398,12224 5323,12149 5323,12111
  region net d9: 5334,11341 5334,11438 5388,11492 5528,11492 5547,11473 5547,11104 5533,11090 5450,11090 5335,11205 5335,11272
  region net g5_i: 4459,12309 4465,12315 4465,12458 4570,12563 5141,12563 5198,12506 5198,12423 5180,12405 5116,12405 5104,12417 5104,12478 5082,12500 4586,12500 4530,12444 4530,12382 4559,12353 4559,12297
  region net vcc: 4059,5499 4059,6737 4124,6802 4124,7513 4060,7577 4060,8908 4040,8928 4040,9462 4138,9560 4197,9560 4206,9551 4206,9320 4119,9233 4119,9033 4142,9010 4189,9010 4189,9022.79 4206,9039.79 4206,9272 4309,9375 4309,9755 4201,9647 4120,9647 3957,9484 3957,7526 3978,7505 4041,7505 4059,7487 4059,7078 4043,7062 3973,7062 3957,7046 3957,5187 4002,5142 4029,5142 4029,5145 4152,5268
  region net gnd: 4858,5596 4784,5670 4784,5881 4803,5900 4950,5900 4968,5918 4968,5962 4951,5979 4455,5979 4368,6066 4368,6602 4207,6763 4181,6737 4133,6737 4133,6646 4101,6614 4101,5848 4137,5812 4296,5812 4319,5789 4318,5788 4318,5619 4386,5551 4835,5551
  region net o1: 3972,12698 3977,12703 4199,12703 4237,12665 4237,12504 4184,12451 4003,12451 3973,12481
  region net g4: 5037,12826 5182,12826 5198,12810 5198,12767 5186,12755 5037,12755 5015,12777
  region net g3: 4721,12833 4722,12834 4908,12834 4927,12815 4923,12811 4923,12768 4829,12768 4818,12757 4817,12758 4762,12758
  region net g2: 4636,12862 4575,12862 4543,12830 4387,12830 4370,12813 4370,12769 4387,12752 4644,12752 4656,12764
  region net o5: 5465,12473 5465,12652 5529,12716 5531,12714 5718,12714 5733,12699 5733,12486 5660,12413 5513,12413
  region net g5: 5273,12882 5273,12820 5344,12749 5344,12447 5374,12417 5410,12417 5410,12420 5424,12434 5423,12435 5423,12523 5439,12539 5439,12829 5367,12901 5294,12901
  region net o4: 5045,13101 5045,12921 5088,12878 5217,12878 5280,12941 5280,13113 5232,13161 5092,13161
  region net o3: 4708,12873 4715,12866 4813,12866 4889,12942 4889,13132 4857,13164 4686,13164 4648,13126 4648,12935 4672,12911
  region net o2: 4329,13126 4361,13158 4536,13158 4567,13127 4567,12929 4500,12862 4388,12862 4329,12921
  region net gnd: 4882,5276 5070,5276 5119,5325 5119,5533 5107,5545 4909,5545 4858,5596 4852,5590 4852,5501 4878,5475 4878,5285 4879,5284
  region net b: 4816,5868 4817,5867 5038,5867 5114,5791 5114,5581 5099,5566 4926,5566 4817,5675 4817,5787
  region net vcc: 4701,5473 4729,5501 4805,5501 4822,5484 4822,5273 4859,5236 4860,5237 5093,5237 5159,5303 5159,5627 5235,5703 5509,5703 5573,5767 5573,5818 5616,5818 5666,5868 5699,5835 5699,5419 5583,5303 5250,5303 5136,5189 5130,5195 4756,5195 4746,5205
  region net vcc: 4701,5473 4701,5313 4667,5279 4453,5279 4397,5223 4295,5223 4250,5268 4250,5445 4215,5480 4078,5480 4059,5499 4059,5348 3983,5272 3983,5188 4029,5142 4993,5142 5014,5121 5128,5121 5302,5295 5663,5295 5717,5349 5717,5779 5693,5803 5584,5803 5584,5717 5608,5693 5547,5632 5547,5348 5512,5313 5232,5313 5136,5217 4813,5217 4784,5246
  region net gnd_s: 4080.48,5718 4260,5718 4260,5622 4380,5502 4656,5502 4679,5479 4679,5344 4653,5318 4438,5318 4386,5266 4312,5266 4292,5286 4292,5464 4242,5514 4104,5514 4080.48,5538.48
  region net a3: 4298,4817 4305,4824 4522,4824 4563,4783 5091,4783 5204,4896 5204,5099 5224,5119 5677,5119 5706,5090 5706,4900 5679,4873 5379,4873 5184,4678 4317,4678 4298,4697
  text "Talash" at 4438.5,6422.75 h140
  text "Sepahan" at 4663.28,6231.7 h200

## Silkscreen, mask and mechanical layers (free items; w line width, h text height)
Bottom Overlay:
  circle w10: c5636,5608 r96.6
  circle w10: c5570,4065 r96.6
  circle w10: c4180,4065 r96.6
  circle w19.68: c4133.86,4451 r139.1
  circle w10: c4133.86,4451 r99.54
  circle w19.68: c4455,4411 r139.1
  circle w10: c4455,4411 r99.54
  circle w19.68: c5571,4448.82 r139.1
  circle w10: c5571,4448.82 r99.54
  circle w19.68: c4134,12854.33 r139.1
  circle w10: c4134,12854.33 r99.54
  circle w19.68: c5572,12854 r139.1
  circle w10: c5572,12854 r99.54
  circle w19.68: c5572,10000 r139.1
  circle w10: c5572,10000 r99.54
  circle w10: c5616,12605 r96.6
  circle w10: c5155,13048 r96.6
  circle w10: c4763,13046 r96.6
  circle w10: c4435,13050 r96.6
  circle w10: c4077,12569 r96.6
  circle w10: c4134,10000 r99.54
  circle w19.68: c4134,10000 r139.1